# EAGLE board avr_routed (EAGLE 5.06)
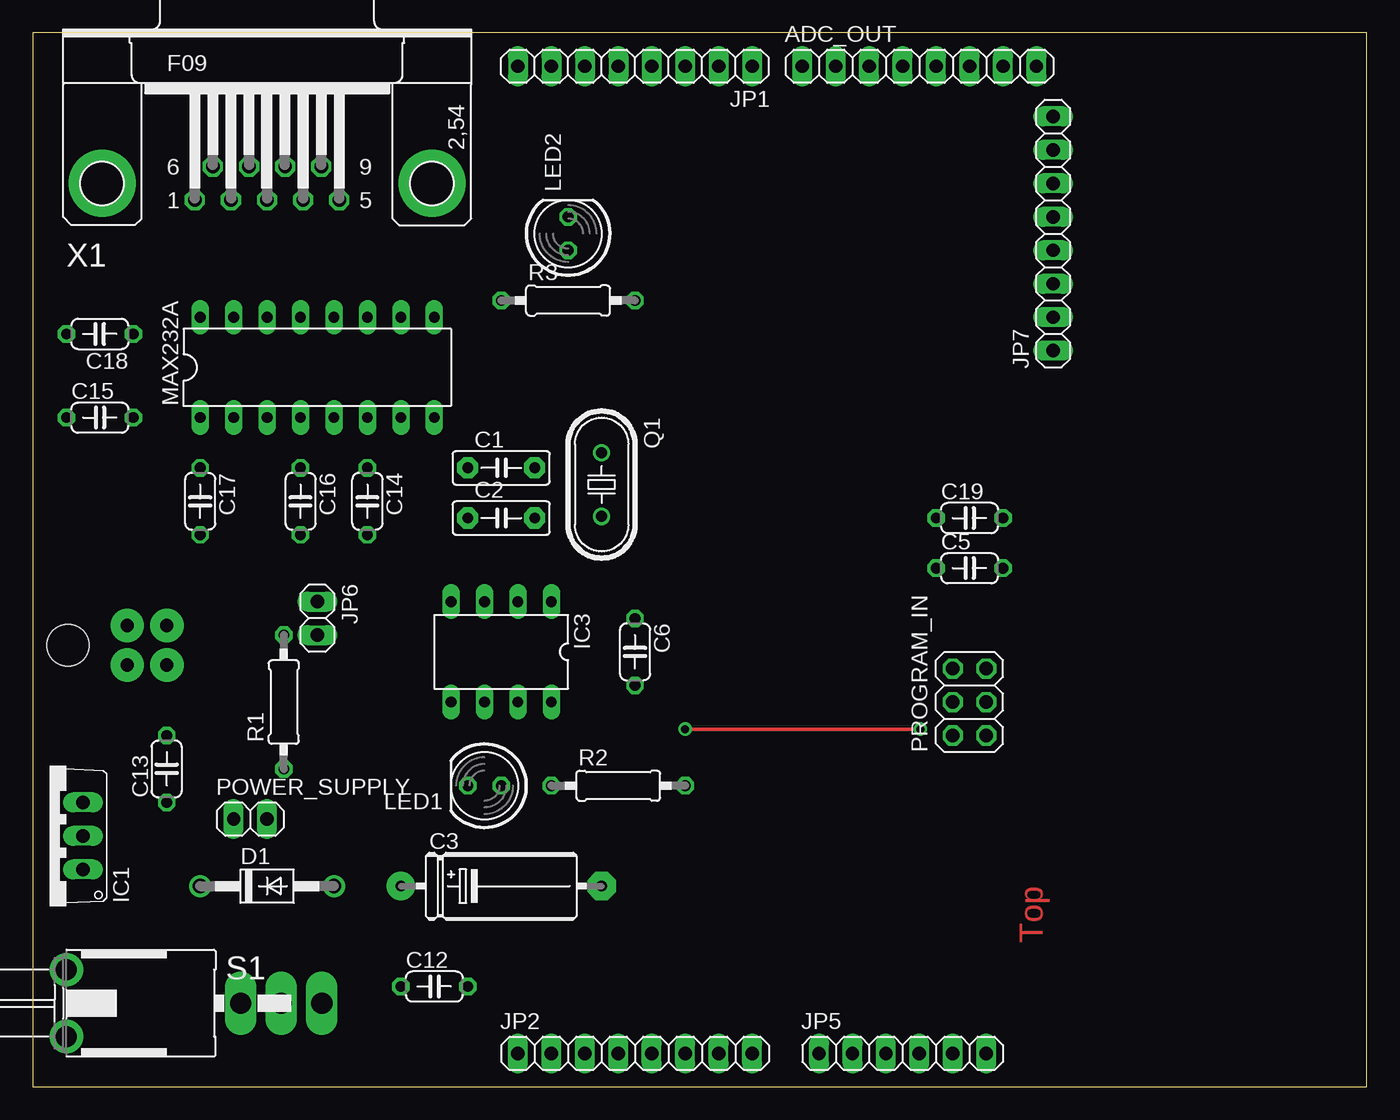
[diagram p0: board, top side]
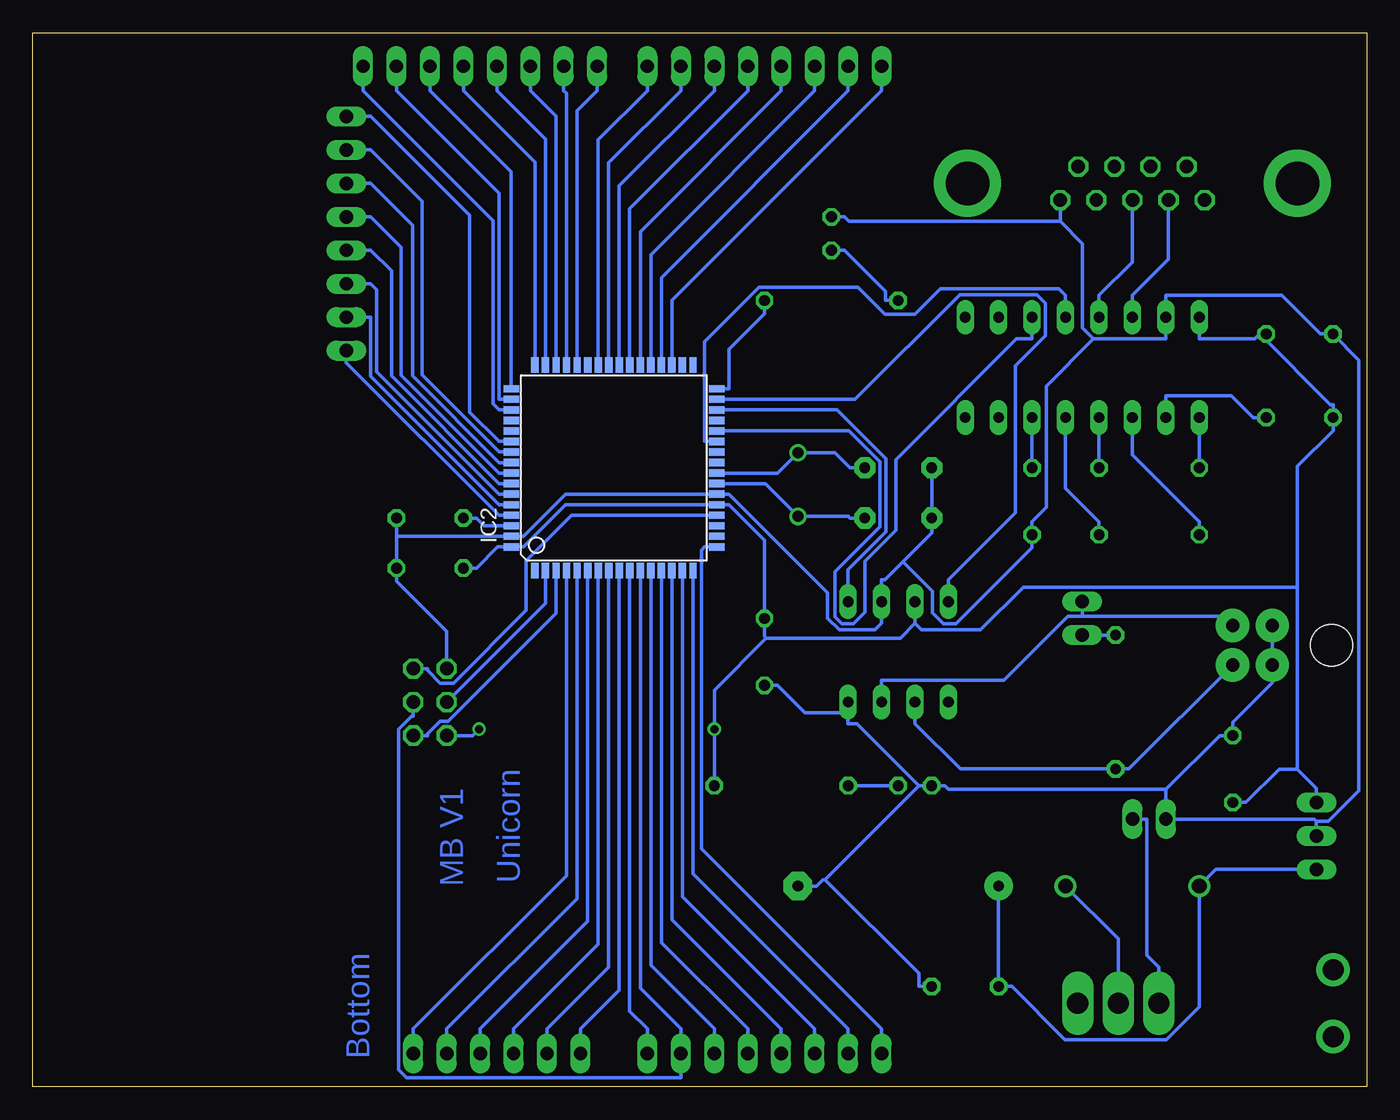
[diagram p1: board, bottom side, seen from below]

Size 101.27 x 80 mm. Coordinates in mm from the lower left corner, seen from the top.
Outline: 0,0 101.27,0 101.27,80 0,80 0,0
Copper layers (1*16): Top 0.035mm / dielectric 1.5mm / Bottom 0.035mm
Design rules "default": minimum track width 10mil, minimum drill 24mil, track to track 8mil, track to pad 8mil, pad to pad 8mil, via to via 8mil, smd to smd 8mil, copper to edge 40mil, drill to drill 8mil, minimum pad ring 10mil, minimum via ring 8mil, stop-mask expansion 4mil, vias tented up to drill 0mil, thermal gap 10mil
tRestrict: area 1.3,55.9 to 3.8,58.4; area 6.3,55.9 to 8.9,58.4; area 1.3,49.5 to 3.8,52.1; area 6.3,49.5 to 8.9,52.1; area 11.4,57.2 to 31.8,59.7; area 11.4,49.5 to 31.8,52.1; area 11.4,45.7 to 14,48.3; area 11.4,40.6 to 14,43.2; area 19.1,45.7 to 21.6,48.3; area 19.1,40.6 to 21.6,43.2; area 24.1,45.7 to 26.7,48.3; area 24.1,40.6 to 26.7,43.2; 47 more areas
vRestrict: area 48.3,38.1 to 66,55.9

## Footprints (pad centres in the part's own frame; a part is rotated, then mirrored left to right if it is on the bottom)
1X08 = drill 1.016 long: 1 -8.89,0; 2 -6.35,0; 3 -3.81,0; 4 -1.27,0; 5 1.27,0; 6 3.81,0; 7 6.35,0; 8 8.89,0
C5B2.5 = drill 0.813 pad 1.6 octagon: 1 -2.54,0; 2 2.54,0
E15-5 = drill 0.813 pad 2.159 round: + -7.62,0 | drill 0.813 pad 2.159 octagon: - 7.62,0
C050-024X044 = drill 0.813 octagon: 1 -2.54,0; 2 2.54,0
DO41-10 = drill 1.118 round: A 5.08,0; C -5.08,0
TO220V = drill 1.016 long: 1 -2.54,-2.54; 2 0,-2.54; 3 2.54,-2.54
TQFP64 = smd 1.194 x 0.559: 1 -7.8,6; 2 -7.8,5.2; 3 -7.8,4.4; 4 -7.8,3.6; 5 -7.8,2.8; 6 -7.8,2; 7 -7.8,1.2; 8 -7.8,0.4; 9 -7.8,-0.4; 10 -7.8,-1.2; 11 -7.8,-2; 12 -7.8,-2.8; 13 -7.8,-3.6; 14 -7.8,-4.4; 15 -7.8,-5.2; 16 -7.8,-6; 33 7.8,-6; 34 7.8,-5.2; 35 7.8,-4.4; 36 7.8,-3.6; 37 7.8,-2.8; 38 7.8,-2; 39 7.8,-1.2; 40 7.8,-0.4; 41 7.8,0.4; 42 7.8,1.2; 43 7.8,2; 44 7.8,2.8; 45 7.8,3.6; 46 7.8,4.4; 47 7.8,5.2; 48 7.8,6 | smd 0.559 x 1.194: 17 -6,-7.8; 18 -5.2,-7.8; 19 -4.4,-7.8; 20 -3.6,-7.8; 21 -2.8,-7.8; 22 -2,-7.8; 23 -1.2,-7.8; 24 -0.4,-7.8; 25 0.4,-7.8; 26 1.2,-7.8; 27 2,-7.8; 28 2.8,-7.8; 29 3.6,-7.8; 30 4.4,-7.8; 31 5.2,-7.8; 32 6,-7.8; 49 6,7.8; 50 5.2,7.8; 51 4.4,7.8; 52 3.6,7.8; 53 2.8,7.8; 54 2,7.8; 55 1.2,7.8; 56 0.4,7.8; 57 -0.4,7.8; 58 -1.2,7.8; 59 -2,7.8; 60 -2.8,7.8; 61 -3.6,7.8; 62 -4.4,7.8; 63 -5.2,7.8; 64 -6,7.8
DIL08 = drill 0.813 long: 1 -3.81,-3.81; 2 -1.27,-3.81; 3 1.27,-3.81; 4 3.81,-3.81; 5 3.81,3.81; 6 1.27,3.81; 7 -1.27,3.81; 8 -3.81,3.81
1X06 = drill 1.016 long: 1 -6.35,0; 2 -3.81,0; 3 -1.27,0; 4 1.27,0; 5 3.81,0; 6 6.35,0
1X02 = drill 1.016 long: 1 -1.27,0; 2 1.27,0
LED5MM = drill 0.813 octagon: A -1.27,0; K 1.27,0
DIL16 = drill 0.813 long: 1 -8.89,-3.81; 2 -6.35,-3.81; 3 -3.81,-3.81; 4 -1.27,-3.81; 5 1.27,-3.81; 6 3.81,-3.81; 7 6.35,-3.81; 8 8.89,-3.81; 9 8.89,3.81; 10 6.35,3.81; 11 3.81,3.81; 12 1.27,3.81; 13 -1.27,3.81; 14 -3.81,3.81; 15 -6.35,3.81; 16 -8.89,3.81
2X03 = drill 1.016 octagon: 1 -2.54,-1.27; 2 -2.54,1.27; 3 0,-1.27; 4 0,1.27; 5 2.54,-1.27; 6 2.54,1.27
HC49U70 = drill 0.813 round: 1 -2.413,0; 2 2.413,0
0207/10 = drill 0.813 octagon: 1 -5.08,0; 2 5.08,0
LPV-1 = drill 1.6 long: 1 0,13.24; 2 0,16.32; 3 0,19.4 | drill 1.6 pad 2.54 round: B -2.54,0; B1 2.54,0
MICROFIT4SOCK = drill 1 pad 2.54 round: PIN1 -2,0; PIN2 1,0; PIN3 -2,-3; PIN4 1,-3 | hole 3.2: -0.5,-7.5
F09HP = drill 1.016 octagon: 1 -5.486,-1.27; 2 -2.743,-1.27; 3 0,-1.27; 4 2.743,-1.27; 5 5.486,-1.27; 6 -4.115,1.27; 7 -1.372,1.27; 8 1.372,1.27; 9 4.115,1.27 | drill 3.302 pad 5.08 round: G1 -12.522,0; G2 12.522,0

## Placement (x,y rotation side)
ADC_OUT  [1X08]  67.31,77.47 0 top
C1  22pF  [C5B2.5]  35.56,46.99 0 top
C2  22pF  [C5B2.5]  35.56,43.18 0 top
C3  330uF  [E15-5]  35.56,15.24 0 top
C5  100nF  [C050-024X044]  71.12,39.37 0 top
C6  100nF  [C050-024X044]  45.72,33.02 270 top
C12  100nF  [C050-024X044]  30.48,7.62 0 top
C13  100nF  [C050-024X044]  10.16,24.13 90 top
C14  100nF  [C050-024X044]  25.4,44.45 270 top
C15  100nF  [C050-024X044]  5.08,50.8 0 top
C16  100nF  [C050-024X044]  20.32,44.45 270 top
C17  100nF  [C050-024X044]  12.7,44.45 270 top
C18  100nF  [C050-024X044]  5.08,57.15 180 top
C19  100nF  [C050-024X044]  71.12,43.18 0 top
D1  1N4004  [DO41-10]  17.78,15.24 0 top
IC1  7805TV  [TO220V]  1.27,19.05 90 top
IC2  MEGA128-A  [TQFP64]  57.15,46.99 90 bottom
IC3  PCA82C250  [DIL08]  35.56,33.02 180 top
JP1  [1X08]  45.72,77.47 180 top
JP2  [1X08]  45.72,2.54 0 top
JP5  [1X06]  66.04,2.54 0 top
JP6  [1X02]  21.59,35.56 270 top
JP7  [1X08]  77.47,64.77 90 top
LED1  [LED5MM]  34.29,22.86 180 top
LED2  [LED5MM]  40.64,64.77 90 top
MAX232A  MAX232  [DIL16]  21.59,54.61 0 top
POWER_SUPPLY  [1X02]  16.51,20.32 0 top
PROGRAM_IN  [2X03]  71.12,29.21 90 top
Q1  18.4320 MHz  [HC49U70]  43.18,45.72 270 top
R1  120  [0207/10]  19.05,29.21 90 top
R2  250  [0207/10]  44.45,22.86 0 top
R3  270  [0207/10]  40.64,59.69 0 top
S1  [LPV-1]  2.54,6.35 270 top
U$1  MICROFIT4  [MICROFIT4SOCK]  10.16,33.02 270 top
X1  [F09HP]  17.78,68.58 0 top

## Library data of the parts
ADC_OUT JP1 JP2 JP5-JP7 POWER_SUPPLY PROGRAM_IN = pinhead
C1 C2 = capacitor-wima
C3 C5 C6 C12-C19 = rcl
D1 = diode
IC1 = linear
IC2 = atmel
IC3 = micro-philips
LED1 LED2 = led
MAX232A = maxim
Q1 = crystal
R1-R3 = resistor
S1 = switch
U$1 = UNICORN
X1 = con-subd

## Nets
+5V: C5.1 C6.1 C13.1 C15.1 C18.1 IC1.3 IC2.21 IC2.64 IC3.3 MAX232A.16 PROGRAM_IN.2 R2.2
GND1: IC2.53
MISO: IC2.3 PROGRAM_IN.1
MOSI: IC2.2 PROGRAM_IN.4
N$1: C1.2 IC2.24 Q1.1
N$2: C2.2 IC2.23 Q1.2
N$3: IC2.9 JP5.1
N$4: D1.A S1.2
N$5: POWER_SUPPLY.2 S1.1
N$6: LED1.A R2.1
N$7: IC2.35 JP1.8
N$8: LED2.A R3.1
N$9: ADC_OUT.1 IC2.44
N$10: C19.1 IC2.62
N$11: ADC_OUT.2 IC2.45
N$12: ADC_OUT.3 IC2.46
N$13: ADC_OUT.4 IC2.47
N$14: ADC_OUT.5 IC2.48
N$15: ADC_OUT.6 IC2.49
N$16: ADC_OUT.7 IC2.50
N$17: ADC_OUT.8 IC2.51
N$18: IC2.16 JP2.2
N$19: IC2.17 JP2.1
N$20: IC2.54 JP7.8
N$21: MAX232A.13 X1.3
N$22: IC2.13 JP2.5
N$23: IC2.36 JP1.7
N$24: IC2.37 JP1.6
N$25: IC2.38 JP1.5
N$26: IC2.39 JP1.4
N$27: IC2.40 JP1.3
N$28: IC2.41 JP1.2
N$29: IC2.42 JP1.1
N$30: IC2.8 JP5.2
N$31: IC2.7 JP5.3
N$32: IC2.6 JP5.4
N$33: MAX232A.14 X1.2
N$34: IC2.5 JP5.5
N$35: C17.1 MAX232A.1
N$36: C17.2 MAX232A.3
N$37: C16.1 MAX232A.4
N$38: C16.2 MAX232A.5
N$39: C14.1 MAX232A.6
N$40: IC2.14 JP2.4
N$41: C15.2 MAX232A.2
N$42: IC2.4 JP5.6
N$43: IC2.32 R3.2
N$44: IC2.55 JP7.7
N$45: IC2.10 JP2.8
N$46: IC2.15 JP2.3
N$47: IC2.12 JP2.6
N$48: IC2.56 JP7.6
N$49: IC2.57 JP7.5
N$50: JP6.2 R1.2
N$51: IC3.6 R1.1 U$1.PIN2
N$52: IC3.7 JP6.1 U$1.PIN1
N$53: IC2.58 JP7.4
N$54: IC2.59 JP7.3
N$55: IC2.60 JP7.2
N$56: IC2.61 JP7.1
PE: C1.1 C2.1 C3.- C5.2 C6.2 C12.2 C13.2 C14.2 C18.2 C19.2 IC1.2 IC2.22 IC2.63 IC3.2 IC3.8 LED1.K LED2.K MAX232A.15 POWER_SUPPLY.1 PROGRAM_IN.6 U$1.PIN3 U$1.PIN4 X1.5
RESET: IC2.20 PROGRAM_IN.5
RXCAN: IC2.31 IC3.4
RXD1: IC2.27 MAX232A.12
SCK: IC2.11 JP2.7 PROGRAM_IN.3
TXCAN: IC2.30 IC3.1
TXD1: IC2.28 MAX232A.11
VCC: C3.+ C12.1 D1.C IC1.1
VCC1: IC2.52

## Tracks (layer width: path | path; a pad name or v marks a point on that pad's centre or on a via)
+5V  (via drill 0.61 pad 1.02)
  Top 0.254: v49.53,27.16 v67.39,27.16
  Bottom 0.254: 45.59,34.06 45.72,34.19 45.72,34.57 C6.1 45.72,41.49 48.42,44.19 IC2.21 60.82,44.19 64.02,40.99 IC2.64 65.97,40.99 67.59,39.37 C5.1 | 34.29,35.18 35.41,34.06 45.59,34.06 | 45.59,34.06 49.53,30.12 v49.53,27.16 R2.2 | 5.24,37.94 26.06,37.94 29.31,34.7 33.81,34.7 34.29,35.18 | 5.24,24.11 5.24,37.94 | 5.24,37.94 5.24,47.11 2.54,49.81 C15.1 2.54,51.79 2.76,51.79 8.12,57.15 | 34.29,35.18 IC3.3 | 5.24,24.11 3.81,22.68 IC1.3 | 5.24,24.11 6.64,24.11 9.17,21.59 C13.1 | MAX232A.16 12.7,56.77 8.5,56.77 8.12,57.15 | 8.12,57.15 C18.1 | PROGRAM_IN.2 67.88,26.67 v67.39,27.16
MISO
  Bottom 0.254: PROGRAM_IN.1 71.3,26.67 71.3,26.81 70.34,27.76 69.74,27.76 61.55,35.95 IC2.3
MOSI
  Bottom 0.254: PROGRAM_IN.4 62.35,36.71 62.35,38.26 | 62.35,38.26 | 62.35,38.26 IC2.2
N$1
  Bottom 0.254: IC2.24 44.72,46.59 Q1.1 40.37,48.13 39.23,46.99 C1.2
N$2
  Bottom 0.254: IC2.23 45.66,45.79 Q1.2 39.36,43.31 39.23,43.18 C2.2
N$3
  Bottom 0.254: JP5.1 59.69,4.39 56.75,7.33 IC2.9
N$4
  Bottom 0.254: S1.2 18.86,11.24 D1.A
N$5
  Bottom 0.254: S1.1 15.78,9.08 16.69,9.99 16.69,20.32 POWER_SUPPLY.2
N$6
  Bottom 0.254: LED1.A R2.1
N$7
  Bottom 0.254: IC2.35 52.75,59.7 36.83,75.62 JP1.8
N$8
  Bottom 0.254: R3.1 36.55,59.69 36.55,60.4 39.65,63.5 LED2.A
N$9
  Bottom 0.254: ADC_OUT.1 58.42,75.62 59.95,74.09 IC2.44
N$10
  Bottom 0.254: C19.1 67.59,43.18 67,42.59 IC2.62
N$11
  Bottom 0.254: ADC_OUT.2 60.96,75.62 60.75,75.41 IC2.45
N$12
  Bottom 0.254: ADC_OUT.3 63.5,75.62 61.55,73.67 IC2.46
N$13
  Bottom 0.254: IC2.47 62.35,71.93 66.04,75.62 ADC_OUT.4
N$14
  Bottom 0.254: ADC_OUT.5 68.58,75.62 63.15,70.19 IC2.48
N$15
  Bottom 0.254: IC2.49 64.95,69.45 71.12,75.62 ADC_OUT.6
N$16
  Bottom 0.254: IC2.50 65.88,52.19 65.88,67.83 73.66,75.62 ADC_OUT.7
N$17
  Bottom 0.254: ADC_OUT.8 76.2,75.62 66.33,65.75 66.33,51.85 65.88,51.39 IC2.51
N$18
  Bottom 0.254: JP2.2 39.37,4.39 51.15,16.17 IC2.16
N$19
  Bottom 0.254: IC2.17 50.28,40.99 50.52,40.75 50.52,18.09 36.83,4.39 JP2.1
N$20
  Bottom 0.254: IC2.54 65.88,48.99 68.11,51.22 68.11,66.15 75.62,73.66 JP7.8
N$21
  Bottom 0.254: MAX232A.13 20.32,60.07 17.78,62.61 X1.3
N$22
  Bottom 0.254: JP2.5 46.99,4.39 53.55,10.95 IC2.13
N$23
  Bottom 0.254: IC2.36 53.55,61.44 39.37,75.62 JP1.7
N$24
  Bottom 0.254: JP1.6 41.91,75.62 54.35,63.18 IC2.37
N$25
  Bottom 0.254: JP1.5 44.45,75.62 55.15,64.92 IC2.38
N$26
  Bottom 0.254: IC2.39 55.95,66.66 46.99,75.62 JP1.4
N$27
  Bottom 0.254: IC2.40 56.75,68.4 49.53,75.62 JP1.3
N$28
  Bottom 0.254: IC2.41 57.55,70.14 52.07,75.62 JP1.2
N$29
  Bottom 0.254: JP1.1 54.61,75.62 58.35,71.88 IC2.42
N$30
  Bottom 0.254: JP5.2 62.23,4.39 57.55,9.07 IC2.8
N$31
  Bottom 0.254: JP5.3 64.77,4.39 58.35,10.81 IC2.7
N$32
  Bottom 0.254: JP5.4 67.31,4.39 59.15,12.55 IC2.6
N$33
  Bottom 0.254: MAX232A.14 17.78,60.07 15.04,62.81 X1.2
N$34
  Bottom 0.254: JP5.5 69.85,4.39 59.95,14.29 IC2.5
N$35
  Bottom 0.254: C17.1 MAX232A.1
N$36
  Bottom 0.254: C17.2 12.7,42.9 17.78,47.98 MAX232A.3
N$37
  Bottom 0.254: C16.1 MAX232A.4
N$38
  Bottom 0.254: C16.2 20.32,42.9 22.86,45.44 MAX232A.5
N$39
  Bottom 0.254: C14.1 MAX232A.6
N$40
  Bottom 0.254: IC2.14 52.75,12.69 44.45,4.39 JP2.4
N$41
  Bottom 0.254: MAX232A.2 15.24,52.45 10.26,52.45 8.61,50.8 C15.2
N$42
  Bottom 0.254: IC2.4 60.75,16.03 72.39,4.39 JP5.6
N$43
  Bottom 0.254: IC2.32 48.42,52.99 48.42,56 45.72,58.7 R3.2
N$44
  Bottom 0.254: JP7.7 75.62,71.12 71.73,67.24 71.73,54.05 65.88,48.19 IC2.55
N$45
  Bottom 0.254: JP2.8 54.61,4.39 55.95,5.73 IC2.10
N$46
  Bottom 0.254: JP2.3 41.91,4.39 51.95,14.43 IC2.15
N$47
  Bottom 0.254: JP2.6 49.53,4.39 54.35,9.21 IC2.12
N$48
  Bottom 0.254: JP7.6 75.62,68.58 72.45,65.42 72.45,53.97 65.88,47.39 IC2.56
N$49
  Bottom 0.254: JP7.5 75.62,66.04 73.31,63.74 73.31,54.03 65.88,46.59 IC2.57
N$50
  Bottom 0.254: R1.2 JP6.2
N$51
  Bottom 0.254: IC3.6 34.29,27.56 30.86,24.13 R1.1 18.85,24.13 18.06,24.13 U$1.PIN2
N$52
  Bottom 0.254: U$1.PIN1 10.88,35.74 21.59,35.74 | 21.59,35.74 JP6.1 | IC3.7 36.83,30.86 27.56,30.86 22.68,35.74 21.59,35.74
N$53
  Bottom 0.254: JP7.4 75.62,63.5 74.05,61.93 74.05,53.96 65.88,45.79 IC2.58
N$54
  Bottom 0.254: JP7.3 75.62,60.96 75.16,60.5 75.16,54.27 65.88,44.99 IC2.59
N$55
  Bottom 0.254: JP7.2 75.62,58.42 75.62,53.93 65.88,44.19 IC2.60
N$56
  Bottom 0.254: IC2.61 65.88,43.39 77.47,54.98 JP7.1
PE
  Bottom 0.254: 35.21,39.86 33.02,42.05 C2.1 C1.1 | 35.21,39.86 36.59,38.48 36.83,38.48 IC3.2 36.83,35.18 37.33,34.68 40.03,34.68 40.93,35.59 40.93,37.5 48.42,44.99 IC2.22 60.82,44.99 64.02,41.79 IC2.63 73.66,41.79 | 35.21,39.86 32.98,37.62 32.98,35.99 32.14,35.15 31.17,35.15 25.4,40.92 C14.2 25.4,42.41 25.4,42.9 24.32,43.98 24.32,53.18 20.73,56.77 | C6.2 44.73,30.48 42.63,28.38 39.37,28.38 | 2.58,57.15 0.59,55.16 0.59,22.46 2.91,20.14 3.81,20.14 | 2.58,57.15 3.53,57.15 6.45,60.07 15.24,60.07 MAX232A.15 15.24,56.77 20.73,56.77 | 2.58,57.15 C18.2 | 15.24,22.58 | 15.24,22.58 11.15,26.67 C13.2 10.16,27.66 7.16,30.66 U$1.PIN4 U$1.PIN3 | 15.24,22.58 POWER_SUPPLY.1 14.15,20.32 3.99,20.32 3.81,20.14 | 15.24,22.58 31.75,22.58 32.03,22.86 LED1.K 34.01,22.86 | C3.- 41.77,15.24 41.28,15.73 41.14,15.73 | 34.01,22.86 41.14,15.73 | 41.14,15.73 34.01,8.61 34.01,7.62 C12.2 | 39.37,28.38 39.37,27.56 38.71,27.56 34.01,22.86 | 39.37,28.38 IC3.8 | 23.27,65.69 21.59,64.01 21.59,57.63 20.73,56.77 | 23.27,65.69 23.27,66.22 X1.5 | 23.27,65.69 39.3,65.69 39.65,66.04 LED2.K | PROGRAM_IN.6 69.85,34.57 73.66,38.38 C5.2 73.66,41.79 | 73.66,41.79 C19.2 | 3.81,20.14 IC1.2
RESET
  Bottom 0.254: PROGRAM_IN.5 71.3,31.75 71.3,31.61 70.34,30.65 69.33,30.65 63.82,36.17 63.82,39.94 60.36,43.39 IC2.20
RXCAN
  Bottom 0.254: IC3.4 31.75,38.48 26.67,43.56 26.67,54.74 24.39,57.02 24.39,59.49 25.03,60.13 30.89,60.13 38.83,52.19 IC2.31
RXD1
  Bottom 0.254: MAX232A.12 22.86,60.07 23.38,60.59 32.37,60.59 34.3,58.65 36.56,58.65 38.61,60.7 46.12,60.7 50.28,56.54 50.28,48.99 IC2.27
SCK
  Bottom 0.254: PROGRAM_IN.3 72.39,28.12 72.53,28.12 73.49,27.16 73.49,1.29 72.88,0.69 52.07,0.69 JP2.7 52.07,4.39 55.15,7.47 IC2.11
TXCAN
  Bottom 0.254: IC3.1 39.37,38.48 | IC2.30 40.22,51.39 36.51,47.68 36.51,42.12 39.37,39.27 39.37,38.48 | 39.37,38.48
TXD1
  Bottom 0.254: MAX232A.11 25.4,56.77 26.58,56.77 35.75,47.59 35.75,42.24 38.1,39.89 38.1,36.02 38.95,35.16 39.85,35.16 40.38,35.69 40.38,39.11 36.97,42.51 36.97,47.46 39.3,49.79 IC2.28
VCC
  Bottom 0.254: IC1.1 11.43,16.51 D1.C 12.7,6.06 15.19,3.57 22.9,3.57 26.95,7.62 C12.1 C3.+

## Text on the board
Top: Top
Bottom: Unicorn | MB V1 | Bottom
tRestrict: 1